# Altium PCB SoalrArray2.PcbDoc
Units mm, origin at the board's own origin, x right, y up, seen from the top; angles counter-clockwise.
Board outline 82 x 320 mm, 2 copper layers (Top Layer, Bottom Layer), stack 1.567 mm thick; 57 components, 32 nets, 160 pads, 2 vias.
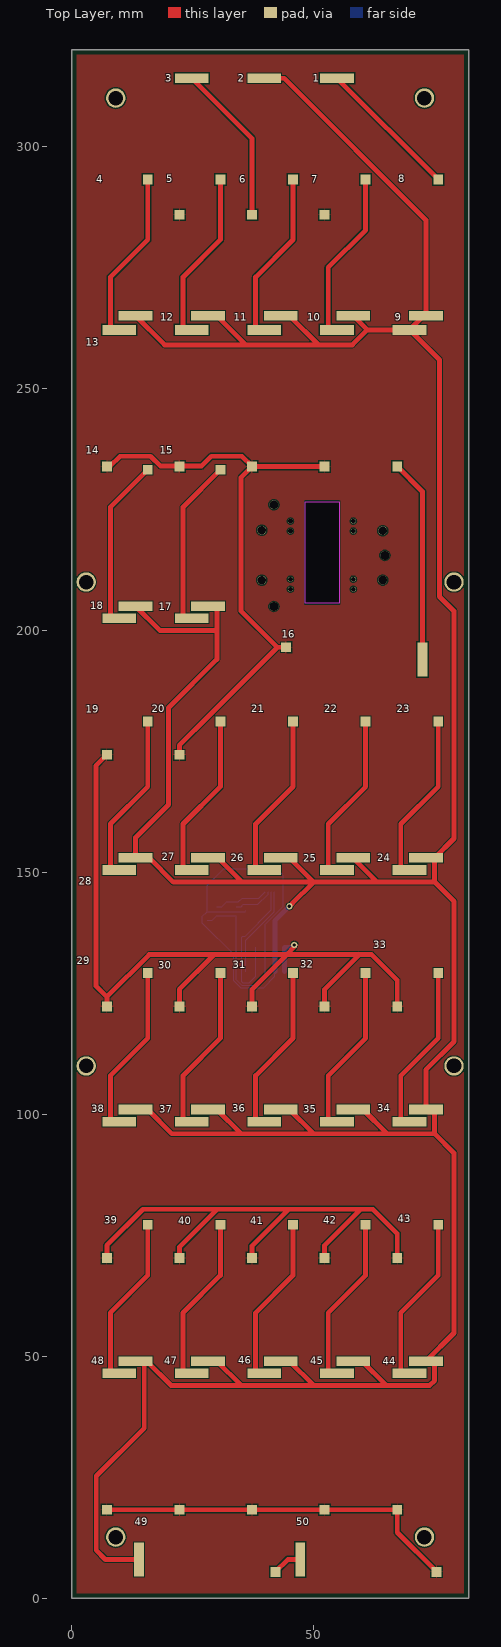
[diagram p0: Top Layer view]
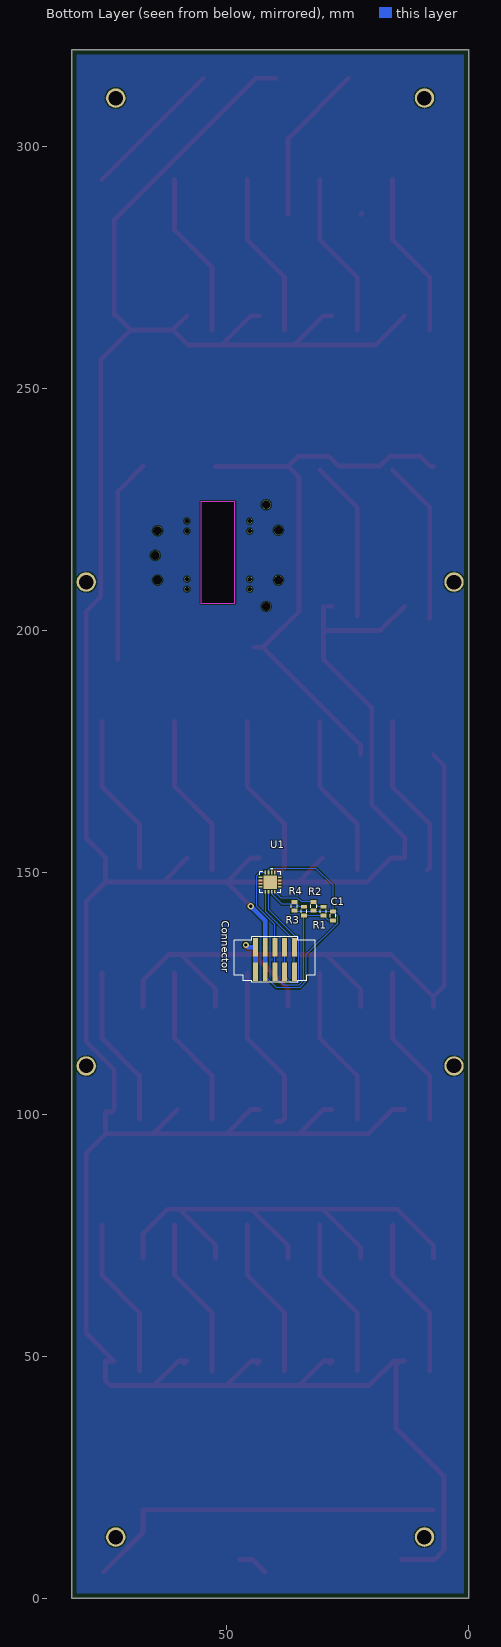
[diagram p1: Bottom Layer view, seen from below]
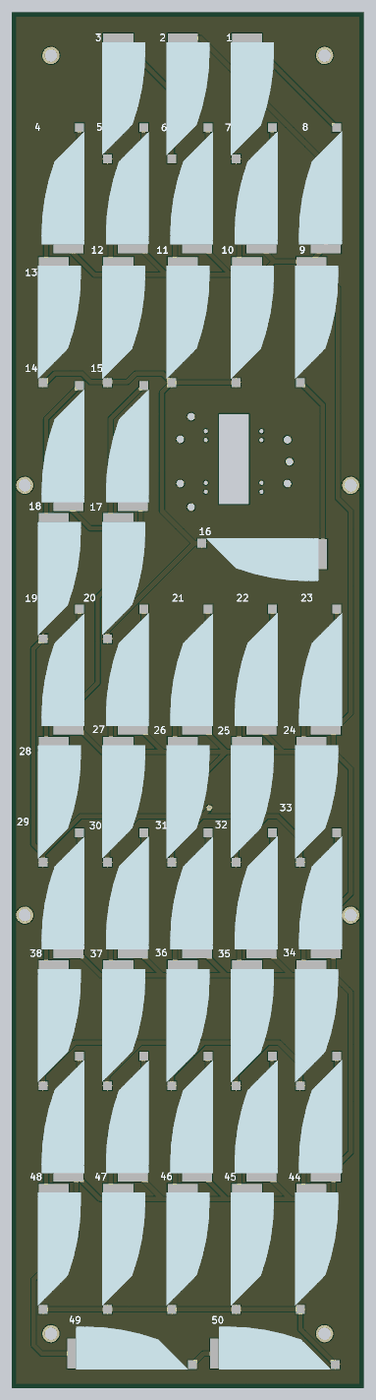
[diagram p2: 3D render of the assembled board from above, using the file's embedded part models]

## Layer stack, top to bottom
Top Solder: solder mask 0.0102, Solder Resist, Dk 3.5
Top Layer: signal copper 0.0356
Dielectric 1: dielectric 1.4961, FR-4, Dk 4.8
Bottom Layer: signal copper 0.0356
Bottom Solder: solder mask 0.0102, Solder Resist, Dk 3.5

## Board outline
82,0 82,320 0,320 0,0
cut-out: 55.28,226.59 55.28,205.59 48.28,205.59 48.28,226.59

## Design rules (kind name [scope] priority, off if disabled: settings)
Clearance [All] p1: gap=0.254
PolygonConnect [All] p1: connectstyle=Relief reliefconductorwidth=0.254 reliefentries=4 polygonreliefangle="90 Angle" airgapwidth=0.254
RoutingVias [All] p1: holewidth=0.711 width=1.27 viastyle="Through Hole" minholewidth=0.711 minwidth=1.27 maxholewidth=0.711 maxwidth=1.27
SolderMaskExpansion [All] p1: expansion=0.102
Width [All] p1: maxlimit=1 minlimit=0.254 preferedwidth=0.254 minimp=50.000000 maximp=50.000000 favimp=50.000000
29 further rules are at their usual default settings.

## Components (designator, comment, footprint, x,y, rotation, side; value= is the part's Value field where it differs from the comment)
1 "Trisol X Solar Wing" PCBComponent_1 51,314.6 r270 top
2 "Trisol X Solar Wing" PCBComponent_1 36,314.6 r270 top
3 "Trisol X Solar Wing" PCBComponent_1 21,314.6 r270 top
4 "Trisol X Solar Wing" PCBComponent_1 17,264.5 r90 top
5 "Trisol X Solar Wing" PCBComponent_1 32,264.5 r90 top
6 "Trisol X Solar Wing" PCBComponent_1 47,264.5 r90 top
7 "Trisol X Solar Wing" PCBComponent_1 62,264.5 r90 top
8 "Trisol X Solar Wing" PCBComponent_1 77,264.5 r90 top
9 "Trisol X Solar Wing" PCBComponent_1 66,262.6 r270 top
10 "Trisol X Solar Wing" PCBComponent_1 51,262.6 r270 top
11 "Trisol X Solar Wing" PCBComponent_1 36,262.6 r270 top
12 "Trisol X Solar Wing" PCBComponent_1 21,262.6 r270 top
13 "Trisol X Solar Wing" PCBComponent_1 6,262.6 r270 top
14 "Trisol X Solar Wing" PCBComponent_1 17,204.5 r90 top
15 "Trisol X Solar Wing" PCBComponent_1 32,204.5 r90 top
16 "Trisol X Solar Wing" PCBComponent_1 73,197.8 r180 top
17 "Trisol X Solar Wing" PCBComponent_1 21,203 r270 top
18 "Trisol X Solar Wing" PCBComponent_1 6,203 r270 top
19 "Trisol X Solar Wing" PCBComponent_1 17,152.5 r90 top
20 "Trisol X Solar Wing" PCBComponent_1 32,152.5 r90 top
21 "Trisol X Solar Wing" PCBComponent_1 47,152.5 r90 top
22 "Trisol X Solar Wing" PCBComponent_1 62,152.5 r90 top
23 "Trisol X Solar Wing" PCBComponent_1 77,152.5 r90 top
24 "Trisol X Solar Wing" PCBComponent_1 66,151 r270 top
25 "Trisol X Solar Wing" PCBComponent_1 51,151 r270 top
26 "Trisol X Solar Wing" PCBComponent_1 36,151 r270 top
27 "Trisol X Solar Wing" PCBComponent_1 21,151 r270 top
28 "Trisol X Solar Wing" PCBComponent_1 6,151 r270 top
29 "Trisol X Solar Wing" PCBComponent_1 17,100.5 r90 top
30 "Trisol X Solar Wing" PCBComponent_1 32,100.5 r90 top
31 "Trisol X Solar Wing" PCBComponent_1 47,100.5 r90 top
32 "Trisol X Solar Wing" PCBComponent_1 62,100.5 r90 top
33 "Trisol X Solar Wing" PCBComponent_1 77,100.5 r90 top
34 "Trisol X Solar Wing" PCBComponent_1 66,99 r270 top
35 "Trisol X Solar Wing" PCBComponent_1 51,99 r270 top
36 "Trisol X Solar Wing" PCBComponent_1 36,99 r270 top
37 "Trisol X Solar Wing" PCBComponent_1 21,99 r270 top
38 "Trisol X Solar Wing" PCBComponent_1 6,99 r270 top
39 "Trisol X Solar Wing" PCBComponent_1 17,48.5 r90 top
40 "Trisol X Solar Wing" PCBComponent_1 32,48.5 r90 top
41 "Trisol X Solar Wing" PCBComponent_1 47,48.5 r90 top
42 "Trisol X Solar Wing" PCBComponent_1 62,48.5 r90 top
43 "Trisol X Solar Wing" PCBComponent_1 77,48.5 r90 top
44 "Trisol X Solar Wing" PCBComponent_1 66,47 r270 top
45 "Trisol X Solar Wing" PCBComponent_1 51,47 r270 top
46 "Trisol X Solar Wing" PCBComponent_1 36,47 r270 top
47 "Trisol X Solar Wing" PCBComponent_1 21,47 r270 top
48 "Trisol X Solar Wing" PCBComponent_1 6,47 r270 top
49 "Trisol X Solar Wing" PCBComponent_1 13.4,4.2 r0 top
50 "Trisol X Solar Wing" PCBComponent_1 46.7,4.2 r0 top
C1 "100pF" 0805 28,141 r270 bottom
Connector "T2M-105-01-L-D-SM" T2M-105-01-X-D-SM 40,132 r180 bottom (schematic designator *)
R1 "1K" 0805 30,142 r270 bottom
R2 "1K" 0805 32,143 r270 bottom
R3 "1K" 0805 34,142 r270 bottom
R4 "1K" 0805 36,143 r270 bottom
U1 "ADT7420UCPZ-R2" CP_16_17 41,148 r90 bottom

## Footprints (in the part's own frame and the unit in brackets; to place one, negate y for a bottom-side part, rotate by r counter-clockwise, add the part's x,y. Pads: shape width x height; smd on the part's side, far side on the other; paste and mask are expansions set on the pad)
0805 [mil]
  rect 32x48 smd: 1(-35.43,0) 2(36,0)
  silkscreen extent -12,-24 12,24
CP_16_17 [mil]
  rect 30x14 smd: 1(-77.5,38.39) 2(-77.5,12.8) 3(-77.5,-12.8) 4(-77.5,-38.39) 9(77.5,-38.39) 10(77.5,-12.8) 11(77.5,12.8) 12(77.5,38.39)
  rect 14x30 smd: 5(-38.39,-77.5) 6(-12.8,-77.5) 7(12.8,-77.5) 8(38.39,-77.5) 13(38.39,77.5) 14(12.8,77.5) 15(-12.8,77.5) 16(-38.39,77.5)
  rect 110x110 smd paste-54.5: 17(0,0)
  silkscreen extent -86,-86 112,86, body extent 0,0 10,10, height 10
PCBComponent_1 [mil]
  rect 80x80 smd: 0(1130,50)
  rect 78.74x275 smd: 1(20,150)
  body extent 60,2 1095,398, height 9
T2M-105-01-X-D-SM [mm]
  rect 1.02x3.8 smd mask+0.05: 1(-4,-2.535) 2(-4,2.535) 3(-2,-2.535) 4(-2,2.535) 5(0,-2.535) 6(0,2.535) 7(2,-2.535) 8(2,2.535) 9(4,-2.535) 10(4,2.535)
  silkscreen extent -8.36,-4.69 8.31,4.69, body extent -7.84,-4.31 7.84,4.31, height 6.5

## Part data
C1: library part CAP0805_1nF
Connector: library part T2M-105-01-X-D-SM
R1 R2 R3 R4: library part RESISTOR0805-RES_1K
U1: "Imported"

## Free pads (board coordinates)
  round 4 hole 3: 1(3,110) 1(3,210) 1(9.1,12.65) 1(9.1,310) 1(72.9,12.65) 1(72.9,310) 1(79,110) 1(79,210)
  round 1.8 hole 1.8: 1(39.276,210.39) 1(39.28,220.691) 1(41.786,204.942) 1(41.786,225.964) 1(64.253,210.4) 1(64.253,220.6) 1(64.723,215.5)
  round 1 hole 1: 1(45.195,208.512) 1(45.195,210.588) 1(45.195,220.512) 1(45.195,222.587) 1(58.195,208.512) 1(58.195,210.588) 1(58.195,220.512) 1(58.195,222.587)

## Via types
v1: diameter 1.27, hole 0.711, Top Layer to Bottom Layer, 2 vias

## Nets (pads, with @x,y where several pads share a name; then routed paths per layer and width w, separated by ;. In a path a pad name is that pad's centre, name@x,y a point inside that pad or via, vN(x,y) a via of type N, cw(c..) or ccw(c..) an arc to the next point about the centre after c; other vN are vias at no path point)
Net1_0: 1.0 3.0 10.0 11.0 12.0 13.0 16.0 17.0 18.0 24.0 25.0 26.0 27.0 28.0 34.0 35.0 36.0 37.0 38.0 44.0 45.0 46.0 47.0 48.0 50.0 Connector.1 Connector.2 | length 488.9
  Top Layer w0.254: 12.0 12.0@22.898,233.898
  Top Layer w1: 48.0 47.0 46.0 45.0 44.0 67.27,13.602 50.0 ; 38.0 7.27,72.929 14.732,80.391 30.099,80.391 ; 28.0 7.27,124.27 ; 18.0 5,172.028 5,126.54 7.27,124.27 ; 13.0 7.898,233.898 10,236 16.292,236 18.292,234 26.876,234 28.876,236 35.168,236 11.0 ; 3.0@22,286.168 3.0 ; 37.0 22.27,72.562 30.099,80.391 ; 27.0 22.27,125.869 29.201,132.8 ; 17.0 22.27,176.27 28.376,182.376 42.53,196.53 16.0 42.47,196.53 35,204 35,231.628 11.0 ; 36.0 37.27,72.83 44.767,80.328 ; 26.0 37.27,125.869 44.401,133 ; v1(46,135) 46,134.599 44.401,133 ; 35.0 52.27,72.971 59.69,80.391 62.23,80.391 67.27,75.351 34.0 ; 25.0 52.27,125.869 59.401,133 62,133 67.27,127.73 24.0 ; 10.0 11.0 ; 59,133 44.401,133 ; 59.563,80.391 30.099,80.391 ; 7.27,124.27 16,133 44.401,133
  Bottom Layer w1: Connector.1 Connector.2 45.535,134.535 v1(46,135)
Net1_1: 1.1 8.0 | length 29.6
  Top Layer w1: 1.1 75.7,293.202 8.0
Net2_0: 2.0 3.1 | length 33.4
  Top Layer w1: 3.1 37.27,301.632 2.0
Net2_1: 2.1 4.1 5.1 6.1 7.1 8.1 9.1 14.1 15.1 19.1 20.1 21.1 22.1 23.1 29.1 30.1 31.1 32.1 33.1 39.1 40.1 41.1 42.1 43.1 49.1 C1.1 Connector.3 Connector.4 pad.1@3,110 pad.1@3,210 pad.1@9.1,12.65 pad.1@9.1,310 pad.1@72.9,12.65 pad.1@72.9,310 pad.1@79,110 pad.1@79,210 R2.2 R4.2 U1.11 | length 867.7
  Top Layer w0.254: 19.1 19.1@13.372,153.19
  Top Layer w1: 29.1 15.705,101.008 20.713,96 75,96 ; 14.1 18.198,200 30,200 ; 4.1 19.198,259 58,259 61.099,262.099 7.1 ; 49.1 6.99,8.01 5.08,9.92 5.08,25.273 14.986,35.179 14.986,48.26 14.238,49.008 39.1 15.508,49.008 20.516,44 74,44 75,45 75,49 74.992,49.008 43.1 79,54.818 79,92 75,96 ; 30.1 29.992,101.008 35,96 ; 15.1 15.1@28.992,205.008 ; 5.1 29.992,265.008 36,259 ; 40.1@28.684,48.514 40.1 29.992,49.008 35,44 ; 15.1@30,205 30,194 20,184 20,164 13.19,157.19 19.1 15.992,153.008 21,148 50,148 ; 20.1@30.19,153.008 35.099,148.099 ; 2.1 43.908,314.092 73.19,284.81 8.1 72.726,265.008 9.1 ; 31.1 44.992,101.008 50,96 ; 21.1 44.992,153.008 50,148 ; 6.1 44.992,265.008 51,259 ; 41.1@43.683,48.515 41.1 44.992,49.008 50,44 ; 45.5,143.5 50,148 ; 22.1 58.19,152.921 63.111,148 ; 42.1@58.683,48.515 42.1 59.992,49.008 65,44 ; 32.1@60.19,101.008 65.099,96.099 ; 61.099,262.092 9.1 ; 33.1 73.19,109.19 79,115 79,144.018 75.009,148.009 ; 33.1@73.684,100.515 75,100.515 75,96 ; 23.1@75,152.515 75,148 63.111,148 ; 23.1@75,153 79,157 79,204 76,207 76,255.902 9.1 ; 50,148 63.111,148
  Bottom Layer w0.254: R4.2 35.814,141.9 C1.1 ; U1.11 41.234,150.06 41.234,150.507 41.011,150.731 31.431,150.731 28,147.3 C1.1 ; Connector.3 42,128.516 39.652,126.168 34.911,126.168 33.492,127.587 33.492,133.039 27.009,139.521 27.009,140.891 28,141.881 C1.1
  Bottom Layer w1: Connector.3 Connector.4 42,140 v1(45,143)
Net4_0: 4.0 13.1 | length 34.3
  Top Layer w1: 13.1@8,262.092 8,273 15.73,280.73 4.0
Net5_0: 5.0 12.1 | length 34.3
  Top Layer w1: 12.1@23,262.092 23,273 30.73,280.73 5.0
Net6_0: 6.0 11.1 | length 34.3
  Top Layer w1: 11.1@38,262.092 38,273 45.73,280.73 6.0
Net7_0: 7.0 10.1 | length 34.3
  Top Layer w1: 10.1@53,262.092 53,275 60.73,282.73 7.0
Net9_0: 9.0 16.1 | length 42.1
  Top Layer w1: 9.0 72.492,228.676 16.1
Net14_0: 14.0 18.1 | length 33.9
  Top Layer w1: 18.1@8,202.492 8,225.472 14.0
Net15_0: 15.0 17.1 | length 33.4
  Top Layer w1: 17.1@23,203 23,225.472 15.0
Net19_0: 19.0 28.1 | length 34.1
  Top Layer w1: 28.1@8.508,150.492 8,151 8,160 15.73,167.73 19.0
Net20_0: 20.0 27.1 | length 33.9
  Top Layer w1: 27.1@23,150.492 23,160 30.73,167.73 20.0
Net21_0: 21.0 26.1 | length 34.7
  Top Layer w1: 26.1@38,151 38,160 45.73,167.73 21.0 ; 26.1@38.508,150.492 26.1
Net22_0: 22.0 25.1 | length 33.9
  Top Layer w1: 25.1@53,150.492 53,160 60.73,167.73 22.0
Net23_0: 23.0 24.1 | length 33.4
  Top Layer w1: 24.1@68,151 68,160 75.73,167.73 23.0
Net29_0: 29.0 38.1 | length 33.4
  Top Layer w1: 38.1@8,99 8,108 15.73,115.73 29.0
Net30_0: 30.0 37.1 | length 33.4
  Top Layer w1: 37.1@23,99 23,108 30.73,115.73 30.0
Net31_0: 31.0 36.1 | length 34.7
  Top Layer w1: 36.1@38,99 38,108 45.73,115.73 31.0 ; 36.1@38.508,98.492 36.1
Net32_0: 32.0 35.1 | length 33.4
  Top Layer w1: 35.1@53,99 53,108 60.73,115.73 32.0
Net33_0: 33.0 34.1 | length 33.4
  Top Layer w1: 34.1@68,99 68,108 75.73,115.73 33.0
Net39_0: 39.0 48.1 | length 33.4
  Top Layer w1: 48.1@8,47 8,59 15.73,66.73 39.0
Net40_0: 40.0 47.1 | length 33.4
  Top Layer w1: 47.1@23,47 23,59 30.73,66.73 40.0
Net41_0: 41.0 46.1 | length 33.4
  Top Layer w1: 46.1@38,47 38,59 45.73,66.73 41.0
Net42_0: 42.0 45.1 | length 33.4
  Top Layer w1: 45.1@53,47 53,59 60.73,66.73 42.0
Net43_0: 43.0 44.1 | length 33.4
  Top Layer w1: 44.1@68,47 68,59 75.73,66.73 43.0
Net49_0: 49.0 50.1 | length 6.2
  Top Layer w1: 49.0 44.642,8.01 50.1
NetC1_2: C1.2 Connector.5 Connector.6 R1.2 R3.2 U1.12 | length 51.3
  Bottom Layer w0.254: C1.2 29,140.086 R1.2 R3.2 34,127.798 35.122,126.676 38.16,126.676 40,128.516 Connector.5 Connector.6 40,139.282 43.73,143.012 43.73,149.311 43.164,149.877 42.066,149.877 U1.12
NetConnector_7: Connector.7 Connector.8 U1.2 | length 31
  Bottom Layer w0.254: Connector.8 Connector.7 38,128.516 36.668,127.184 35.332,127.184 35.109,127.407 35.109,136.593 35.332,136.816 35.816,136.816 41.234,142.234 41.234,145.94 U1.2
NetConnector_9: Connector.9 Connector.10 U1.1 | length 19
  Bottom Layer w0.254: Connector.9 Connector.10 36,136 41.884,141.884 41.884,145.94 U1.1
NetR1_1: R1.1 R2.1 U1.4 | length 11.3
  Bottom Layer w0.254: R1.1 31,142.9 R2.1 34.445,143.9 35.245,144.7 38.693,144.7 U1.4
NetR3_1: R3.1 R4.1 U1.3 | length 8.2
  Bottom Layer w0.254: R3.1 35,142.9 35.492,143.392 38.483,143.392 40.584,145.493 40.584,145.94 U1.3
pads on no net: U1.5 U1.6 U1.7 U1.8 U1.9 U1.10 U1.13 U1.14 U1.15 U1.16 U1.17

## Polygon pours and split planes (outlines as drawn)
Net1_0 on Top Layer "Array_pos" (solid, pour order 4): 1,319 81,319 81,1 82,0 81,1 1,1
Net2_1 on Bottom Layer "Array_neg" (solid, pour order 2): 1,319 81,319 81,1 1,1

## Text inside footprints (layer, text, board x,y; h text height)
Connector: Mechanical 1 "J1" at 40.497,131.492 h0.76
U1: Mechanical 13 "*" at 42.3,146.413 h1.27 r270